# Allegro board XR872AT_REF_SAMPLE_V1_0-20191008.brd
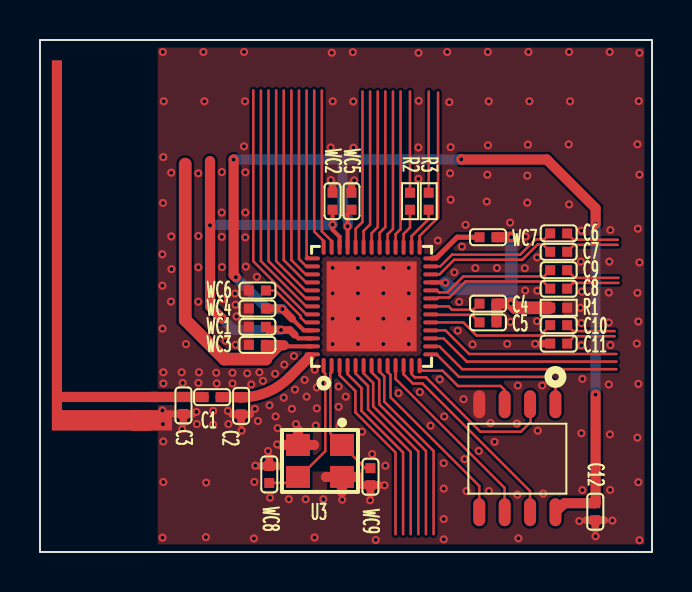
[diagram p0: board, top side]
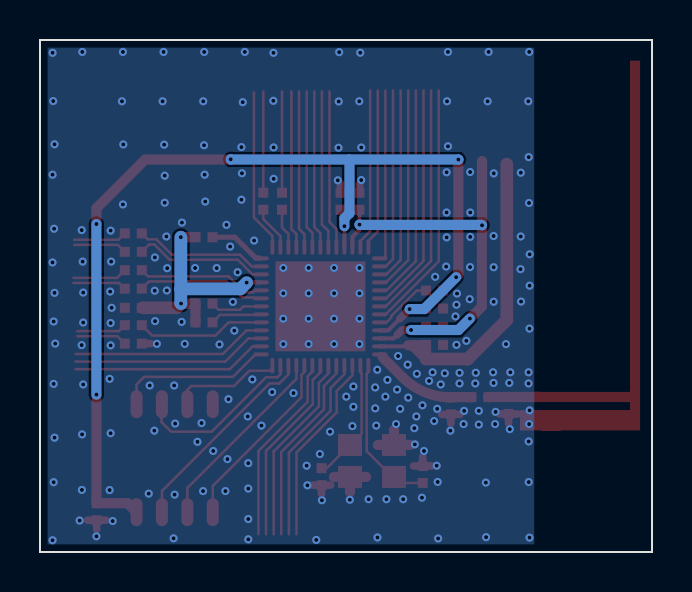
[diagram p1: board, bottom side, seen from below]

Outline 30.61 x 25.62 mm; copper layers: TOP, BOTTOM. Coordinates in mm from the lower left corner of the outline.
Outline path: rectangle 0,0 30.61,25.62

## Placement (name value [footprint] x y rotation side)
C1  0R  [C0402]  8.61 7.75 180 top
C2  NC  [C0402]  10.06 7.31 90 top
C3  NC  [C0402]  7.17 7.33 90 top
C4  0.47uF  [C0402]  22.41 12.43 180 top
C5  0.47uF  [C0402]  22.41 11.49 180 top
C6  104  [C0402]  25.94 15.94 180 top
C7  104  [C0402]  25.94 15.02 180 top
C8  104  [C0402]  25.94 13.17 180 top
C9  104  [C0402]  25.94 14.1 180 top
C10  104  [C0402]  25.94 11.35 180 top
C11  104  [C0402]  25.94 10.43 180 top
C12  NC-104  [C0402]  27.77 2.02 90 top
JW1  ANT-F  [ANT2B18_54X5_30]  5.64 7.76 90 top
R1  0R  [R0402]  25.94 12.22 0 top
R2  510R  [R0402]  18.51 17.55 90 top
R3  510R  [R0402]  19.44 17.55 90 top
U2  XR872AT  [QFN52P0_4B6_00X6_00]  16.58 12.29 90 top
U3  40MHz-E3SB40MHz  [CRY-TSX3225]  14 4.56 270 top
U4  SPI_NOR_16Mb  [SOP8_150MIL]  23.87 4.67 270 top
WC1  1uF  [C0402]  10.87 11.26 0 top
WC2  NC-1uF  [C0402]  14.63 17.55 270 top
WC3  1uF  [C0402]  10.87 10.36 180 top
WC4  1uF  [C0402]  10.87 12.18 180 top
WC5  NC-1uF  [C0402]  15.58 17.55 270 top
WC6  1uF  [C0402]  10.87 13.08 0 top
WC7  1uF  [C0402]  22.41 15.75 180 top
WC8  10pF  [C0402]  11.47 3.88 270 top
WC9  10pF  [C0402]  16.53 3.77 270 top

## Library data of the parts
C1-C11 WC2-WC7 WC9 = CAPACITOR
C12 WC1 WC8 = CAPACITOR_0
JW1 = ANT-F_1
R1-R3 = R
U2 = XR872AT_0
U3 = Crystal4Pin_0
U4 = SPI-NOR-SO8

## Footprints (pads in the part's own frame, mm; a bottom-side part is the same pattern mirrored in y, then rotated)
ANT2B18_54X5_30
  rect 1.016x1.016 smd: 1(-1.168,0.577)
  rect 0.508x0.508 smd: 2(0,0)
C0402
  rect 0.5x0.5 smd: 1(-0.425,0) 2(0.425,0)
CRY-TSX3225
  rect 1.1x1.2 smd: 1(-0.8,1.1) 2(-0.8,-1.1) 3(0.8,-1.1) 4(0.8,1.1)
QFN52P0_4B6_00X6_00
  oval 0.77x0.2 smd: 1(-2.965,2.4) 2(-2.965,2) 3(-2.965,1.6) 4(-2.965,1.2) 5(-2.965,0.8) 6(-2.965,0.4) 7(-2.965,0) 8(-2.965,-0.4) 9(-2.965,-0.8) 10(-2.965,-1.2) 11(-2.965,-1.6) 12(-2.965,-2) 13(-2.965,-2.4) 27(2.965,-2.4) 28(2.965,-2) 29(2.965,-1.6) 30(2.965,-1.2) 31(2.965,-0.8) 32(2.965,-0.4) 33(2.965,0) 34(2.965,0.4) 35(2.965,0.8) 36(2.965,1.2) 37(2.965,1.6) 38(2.965,2) 39(2.965,2.4)
  oval 0.2x0.77 smd: 14(-2.4,-2.965) 15(-2,-2.965) 16(-1.6,-2.965) 17(-1.2,-2.965) 18(-0.8,-2.965) 19(-0.4,-2.965) 20(0,-2.965) 21(0.4,-2.965) 22(0.8,-2.965) 23(1.2,-2.965) 24(1.6,-2.965) 25(2,-2.965) 26(2.4,-2.965) 40(2.4,2.965) 41(2,2.965) 42(1.6,2.965) 43(1.2,2.965) 44(0.8,2.965) 45(0.4,2.965) 46(0,2.965) 47(-0.4,2.965) 48(-0.8,2.965) 49(-1.2,2.965) 50(-1.6,2.965) 51(-2,2.965) 52(-2.4,2.965)
  rect 4.5x4.5 smd: 53(0,0)
R0402
  rect 0.5x0.5 smd: 1(-0.425,0) 2(0.425,0)
SOP8_150MIL
  oval 1.4x0.6 smd: 1(-2.725,1.905) 2(-2.725,0.635) 3(-2.725,-0.635) 4(-2.725,-1.905) 5(2.675,-1.905) 6(2.675,-0.635) 7(2.675,0.635) 8(2.675,1.905)

## Nets
AVDD: U2.26(AVDD) WC7.2
GND: C2.1 C3.1 C11.2 C12.1 JW1.1(A) R1.2 U2.53(EPAD) U3.2 U3.4(5) U4.4(VSS) WC1.1 WC2.1 WC3.2 WC4.2 WC5.1 WC6.1 WC8.1 WC9.2
VCC-BAT: U2.51(VBAT) WC3.1
VDD-ANA: U2.37(VDD_PSM) U2.50(VDD_ANA) WC1.2 WC2.2
VDD-EXT: C12.2 U2.36(VDDIO) U2.49(VDD_EXT) U4.8(VCC) WC4.1 WC5.2
ANT: C1.2 C3.2 JW1.2(G)
CHIP-PWD: U2.47(CHIP_PWD)
HXTAL1: U2.2(HXTAL1) U3.1 WC9.1
HXTAL2: U2.1(HXTAL2) U3.3 WC8.2
LINEINN: C9.2 U2.22(LINEN)
LINEINP: C8.2 U2.21(LINEP)
LOUTP: C10.2 U2.18(LOUTP)
MICN: C7.2 U2.24(MICN)
MICP: C6.2 U2.25(MICP)
PA0: U2.5(PA0/SPI1_MOSI/SD_CMD/TWI1_SCL/C)
PA1: U2.6(PA1/SPI1_MISO/SD_DATA0/TWI1_SDA)
PA2: U2.7(PA2/SPI1_CLK/SD_CLK/UART0_TX/CS)
PA3: U2.8(PA3/SPI1_CS0/SD_DATA1/UART0_RX/)
PA4: U2.35(PA4/WUPIO0/UART1_RTS/SD_DATA2/T)
PA5: U2.34(PA5/WUPIO1/UART1_CTS/SD_DATA3/T)
PA6: U2.33(PA6/WUPIO2/UART1_RX/SPI1_CS1/TW)
PA7: U2.32(PA7/WUPIO3/UART1_TX/SPI1_CS2/TW)
PA8: U2.41(PA8/FEM_CTRL1/PWM0/TWI1_SCL/CSI)
PA9: U2.40(PA9/FEM_CTRL2/PWM1/TWI1_SDA/CSI)
PA10: U2.39(PA10/ADC_CH0/PWM2/DMIC_CLK/CSI_)
PA11: U2.38(PA11/ADC_CH1/PWM3/DMIC_DATA/CSI)
PA12: U2.46(PA12/ADC_CH2/PWM4/I2S_MCLK/IR_T)
PA13: U2.45(PA13/ADC_CH3/PWM5/I2S_BCLK/UART)
PA14: U2.44(PA14/ADC_CH4/PWM6/I2S_DI/UART1_)
PA15: U2.43(PA15/ADC_CH5/PWM7/I2S_DO/UART1_)
PA16: U2.42(PA16/ADC_CH6/IR_RX/I2S_LRCLK/UA)
PA19: U2.31(PA19/WUPIO5/UART2_RTS/TWI0_SCL/)
PA20: U2.30(PA20/WUPIO6/UART2_CTS/TWI0_SDA/)
PA21: R2.1 U2.29(PA21/WUPIO7/UART2_RX/DMIC_CLK/P)
PA22: R3.1 U2.28(PA22/WUPIO8/UART2_TX/DMIC_DATA/)
PA23: U2.27(PA23/WUPIO9/TEST/EXT_DCDC_PUP/F)
PB2: U2.13(PB2/SWD_TMS/JTAG_TDO/PWM6/FLASH) U4.3(WP#)
PB3: U2.11(PB3/SWD_TCK/JTAG_TDI/PWM7/FLASH) U4.7(HOLD#)
PB16: U2.15(PB16/SD_CMD/EINTB16)
PB17: U2.16(PB17/SD_DATA0/EINTB17)
PB18: U2.17(PB18/SD_CLK/EINTB18)
RF: C1.1 C2.2 U2.52(ANT)
SPI0-CLK: U2.10(PB7/SPI0_CLK/SD_CLK/UART1_RTS/F) U4.6(CLK)
SPI0-CS: U2.14(PB6/SPI0_CS0/FEM_CTRL2/UART1_CT) U4.1(CS#)
SPI0-MISO: U2.12(PB5/SPI0_MISO/SD_DATA0/UART1_RX) U4.2(MISO)
SPI0-MOSI: U2.9(PB4/SPI0_MOSI/SD_CMD/UART1_TX/F) U4.5(MOSI)
UART0-RX: U2.4(PB1/UART0_RX/JTAG_TCK/PWM5/SWD_)
UART0-TX: U2.3(PB0/UART0_TX/JTAG_TMS/PWM4/SWD_)
N17215602: C11.1
N17215603: C10.1
N17220262: C4.1 C5.1 R1.1 U2.23(AGND) WC7.1
N17220370: C4.2 U2.20(VRA1)
N17220484: U2.48(VDD_DIG) WC6.2
N17220546: C5.2 U2.19(VRA2)
N17222306: R2.2
N17222380: R3.2
N17223703: C9.1
N17223705: C8.1
N17227750: C6.1
N17227752: C7.1

## Via types
v1: diameter 0.406, hole 0.203, TOP to BOTTOM, 241 vias

## Routing (per net, layer and track width the routed paths; a pad name or vN(x,y) marks a point on that pad's centre or on a via; arc(x,y) is an arc through that point)
AVDD: length 2.9
  TOP w0.203: U2.26 19.63,14.69 19.66,14.72
  TOP w0.254: WC7.2 20.86,15.75 19.83,14.72 19.66,14.72
GND: length 12.9
  TOP w0.381: 27.77,1.14 C12.1 ; C12.1 27.32,1.59 ; C12.1 28.23,1.59 ; WC9.2 16.98,3.35 ; WC9.2 16.07,3.35 ; WC9.2 16.53,2.89 ; WC8.1 11.47,4.76 ; WC8.1 11.92,4.3 ; WC8.1 11.01,4.3 ; C3.1 7.63,6.91 ; C3.1 7.17,6.45 ; C3.1 6.72,6.91 ; WC2.1 14.63,18.43 ; WC5.1 15.58,18.43 ; 9.61,6.89 C2.1 ; C2.1 10.06,6.43 ; C2.1 10.51,6.89 ; 25.06,10.43 C11.2
  TOP w0.508: U3.4 15.91,3.76 ; U3.4 15.1,3 ; U3.4 14.3,3.76 ; 12.1,5.36 U3.2 ; U3.2 12.9,6.11 ; U3.2 13.71,5.36
  vias: v1(6.14,25.02) v1(6.12,14.89) v1(6.12,13.32) v1(6.13,11.18) v1(6.12,7.09) v1(6.15,6.4) v1(6.13,0.72) v1(6.19,22.55) v1(6.17,19.76) v1(6.15,17.46) v1(6.17,8.99) v1(6.17,8.43) v1(6.17,5.53) v1(6.17,3.5) v1(6.55,12.53) v1(6.56,18.98) v1(6.57,15.79) v1(6.58,14.15) v1(7.09,8.99) v1(7.14,8.46) v1(7.11,6.15) v1(7.3,10.4) v1(7.82,7.01) v1(7.85,6.4) v1(7.91,18.94) v1(7.92,15.81) v1(7.92,14.25) v1(7.92,12.52) v1(7.92,8.46) v1(7.95,8.99) v1(8.17,25.02) v1(8.22,22.55) v1(8.31,3.47) v1(8.3,0.74) v1(8.66,7.06) v1(8.66,6.38) v1(8.81,8.97) v1(8.84,8.43) v1(9.1,19.01) v1(9.09,16.98) v1(9.09,15.77) v1(9.1,14.25) v1(9.12,12.65) v1(9.29,10.57) v1(9.4,7.06) v1(9.42,6.4) v1(9.63,8.97) v1(9.63,8.43) v1(9.75,12.93) v1(9.78,12.37) v1(9.83,11.79) v1(9.78,10.36) v1(10.08,6.07) v1(10.21,25.02) v1(10.2,20.3) v1(10.25,22.55) v1(10.27,19) v1(10.27,16.98) v1(10.27,15.74) v1(10.3,14.28) v1(10.36,8.94) v1(10.57,8.38) v1(10.74,7.16) v1(10.72,3.51) v1(10.7,0.68) v1(10.85,13.77) v1(10.77,4.32) v1(10.9,6.55) v1(10.97,8.99) v1(11.15,8.56) v1(11.4,5.05) v1(11.48,7.34) v1(11.51,2.72) v1(11.76,8.92) v1(11.79,6.78) v1(11.89,6.2) v1(11.86,5.38) v1(12.22,9.37) v1(12.19,7.72) v1(12.45,2.64) v1(12.6,7.16) v1(12.7,9.8) v1(12.75,8.13) v1(12.8,6.4) v1(13.23,8.61) v1(13.34,7.77) v1(13.28,2.64) v1(13.74,9.12) v1(13.73,0.73) v1(13.85,8.23) v1(13.84,7.19) v1(13.79,6.32) v1(14.17,2.64) v1(14.54,20.24) v1(14.54,18.61) v1(14.59,24.98) v1(14.64,22.55) v1(14.63,14.21) v1(14.63,12.94) v1(14.63,11.67) v1(14.63,10.4) v1(14.94,8.28) v1(14.94,7.26) v1(14.99,6.3) v1(15.11,2.62) v1(15.29,7.77) v1(15.65,25.01) v1(15.67,22.54) v1(15.68,20.22) v1(15.71,18.59) v1(15.9,14.21) v1(15.9,12.94) v1(15.9,11.67) v1(15.9,10.4) v1(16.1,6.02) v1(16.51,2.59) v1(16.61,4.9) v1(16.79,0.61) v1(17.17,14.21) v1(17.17,12.94) v1(17.17,11.67) v1(17.17,10.4) v1(17.23,3.34) v1(17.27,4.32) v1(17.93,7.95) v1(18.44,14.21) v1(18.44,12.94) v1(18.44,11.67) v1(18.44,10.4) v1(18.93,24.97) v1(18.94,22.57) v1(18.93,20.24) v1(18.92,18.67) v1(19,8) v1(19.53,6.32) v1(19.9,15.58) v1(19.99,8.64) v1(20.22,6.78) v1(20.19,4.45) v1(20.19,3.17) v1(20.19,1.65) v1(20.19,0.64) v1(20.37,25.02) v1(20.47,22.5) v1(20.54,20.26) v1(20.51,18.95) v1(20.54,17.62) v1(20.73,14) v1(20.89,11.07) v1(20.96,12.51) v1(21.1,15.28) v1(21.18,7.65) v1(21.23,4.65) v1(21.28,16.37) v1(21.34,3.05) v1(21.63,10.39) v1(21.77,14.2) v1(21.95,5.05) v1(22.35,17.53) v1(22.4,25.02) v1(22.44,22.55) v1(22.4,20.35) v1(22.37,18.88) v1(22.53,6.45) v1(22.45,3.05) v1(22.73,5.51) v1(22.85,14.21) v1(23.37,10.41) v1(23.51,16.48) v1(23.53,11.51) v1(23.9,8.33) v1(23.85,6.43) v1(23.88,2.87) v1(23.93,0.69) v1(24.25,14.2) v1(24.29,15.78) v1(24.27,13.08) v1(24.43,25.02) v1(24.4,20.38) v1(24.37,18.83) v1(24.37,17.47) v1(24.48,22.55) v1(24.77,10.41) v1(24.86,14.74) v1(24.87,13.07) v1(24.85,11.55) v1(24.89,6.07) v1(25.12,8.33) v1(25.17,2.92) v1(26.44,20.39) v1(26.46,25.02) v1(26.51,22.55) v1(26.46,17.39) v1(27.03,12.22) v1(26.97,1.55) v1(27.08,16.08) v1(27.05,14.53) v1(27.1,13.03) v1(27.08,11.46) v1(27.08,10.34) v1(27.13,8.66) v1(27.08,5.94) v1(27.13,3.1) v1(27.79,0.79) v1(28.45,12.98) v1(28.45,11.48) v1(28.45,8.38) v1(28.49,25.02) v1(28.52,16.1) v1(28.47,14.53) v1(28.53,10.35) v1(28.5,5.89) v1(28.51,3.11) v1(28.63,1.57) v1(29.85,10.43) v1(29.95,22.56) v1(29.88,20.4) v1(29.9,16.17) v1(29.88,12.96) v1(29.93,11.53) v1(29.93,8.41) v1(29.88,5.72) v1(29.93,3.49) v1(29.98,24.97) v1(29.98,18.88) v1(29.98,14.49) v1(29.98,0.59)
VCC-BAT: length 16.6
  TOP w0.203: 12.19,10.34 12.25,10.29 U2.51
  TOP w0.508: 11.91,10.34 11.91,10.26 11.3,9.65 WC3.1 11.32,10.34 11.91,10.34 ; 11.91,10.34 12.19,10.34
  TOP w0.635: 11.3,9.65 9.22,9.65 7.26,11.61 7.26,19.41
VDD-ANA: length 22
  TOP w0.203: U2.37 14.98,15.77 14.63,16.12 v1(14.63,16.38) WC2.2 ; U2.50 12.92,10.69 12.74,10.87
  TOP w0.381: 12.74,10.87 12.51,11.1 12.06,11.1 ; 12.06,11.1 v1(12.05,11.11) ; 12.06,11.1 11.46,11.1 WC1.2
  TOP w0.508: v1(9.11,11.68) 8.51,12.28 8.51,16.34 v1(8.5,16.34) 8.5,19.56
  BOTTOM w0.508: v1(14.63,16.38) 14.62,16.36 8.52,16.36 v1(8.5,16.34) ; v1(12.05,11.11) 9.68,11.11 v1(9.11,11.68)
VDD-EXT: length 53.2
  TOP w0.203: 12.61,11.67 13.19,11.09 U2.49 ; U2.36 v1(15.39,16.3) 15.39,16.93 WC5.2
  TOP w0.381: 12.61,11.67 v1(12.13,12.15) 12.1,12.18 WC4.1
  TOP w0.508: v1(27.79,7.87) 27.79,2.46 C12.2 26.23,2.44 U4.8 ; v1(9.8,13.75) 9.69,13.86 9.69,19.63 v1(9.68,19.63) ; v1(21.07,19.65) 21.09,19.63 25.35,19.63 27.79,17.2 v1(27.79,16.41)
  BOTTOM w0.508: v1(9.8,13.75) 11.39,12.15 v1(12.13,12.15) ; v1(27.79,7.87) v1(27.79,16.41) ; v1(21.07,19.65) 21.06,19.63 15.14,19.63 ; 15.14,19.63 15.13,19.63 15.13,16.95 15.39,16.69 v1(15.39,16.3) ; 15.14,19.63 9.69,19.63 v1(9.68,19.63)
ANT: length 2.6
  TOP w0.508: JW1.2 5.64,7.76 C3.2 8.17,7.76 C1.2
CHIP-PWD: length 12.6
  TOP w0.127: 10.67,23.09 10.67,14.54 13.32,11.89 U2.47
HXTAL1: length 6.1
  TOP w0.127: U2.2 14.58,9 14.52,8.94 14.52,5.94 U3.1 16.26,4.2 WC9.1
HXTAL2: length 7.8
  TOP w0.127: WC8.2 12.6,3.45 U3.3 12.98,3.76 14.27,5.05 14.27,8.91 14.18,9 U2.1
LINEINN: length 6.5
  TOP w0.127: U2.22 19.86,13.09 19.96,12.99 20.37,12.99 21.17,13.79 25.21,13.79 C9.2
LINEINP: length 6.5
  TOP w0.127: C8.2 25.16,13.53 21.28,13.53 20.48,12.73 19.93,12.73 19.89,12.69 U2.21
LOUTP: length 6.5
  TOP w0.127: C10.2 25,10.83 21.83,10.83 21.17,11.49 U2.18
MICN: length 6.7
  TOP w0.127: U2.24 19.98,13.89 20.71,14.62 24.12,14.62 24.89,15.39 25.15,15.39 C7.2
MICP: length 6.7
  TOP w0.127: C6.2 25.22,15.64 24.79,15.64 24.02,14.88 20.61,14.88 20.02,14.29 U2.25
PA0: length 9.6
  TOP w0.127: U2.5 15.78,8.93 16.41,8.31 16.41,7.14 18.54,5 18.54,0.89
PA1: length 9.6
  TOP w0.127: 18.92,0.89 18.92,5.03 16.66,7.29 16.66,8.46 16.18,8.94 U2.6
PA2: length 9.6
  TOP w0.127: 19.3,0.89 19.3,5.05 16.97,7.39 16.97,8.61 16.58,8.99 U2.7
PA3: length 9.6
  TOP w0.127: 19.68,0.89 19.68,5.05 17.22,7.52 17.22,8.79 16.98,9.02 U2.8
PA4: length 7.9
  TOP w0.127: U2.35 15.78,16.17 16.13,16.51 16.13,23.04
PA5: length 7.9
  TOP w0.127: 16.51,23.04 16.51,16.38 16.18,16.06 U2.34
PA6: length 7.9
  TOP w0.127: U2.33 16.58,15.95 16.89,16.26 16.89,23.04
PA7: length 7.9
  TOP w0.127: U2.32 16.98,15.97 17.27,16.26 17.27,23.04
PA8: length 9.3
  TOP w0.127: U2.41 13.32,14.29 12.95,14.66 12.95,23.09
PA9: length 8.6
  TOP w0.127: 13.34,23.09 13.34,14.81 13.46,14.69 U2.40
PA10: length 8
  TOP w0.127: 13.72,23.09 13.72,16.03 14.18,15.56 U2.39
PA11: length 8
  TOP w0.127: 14.1,23.09 14.1,16.05 14.58,15.56 U2.38
PA12: length 12
  TOP w0.127: U2.46 13.32,12.29 11.05,14.55 11.05,23.09
PA13: length 11.5
  TOP w0.127: U2.45 13.3,12.69 11.43,14.55 11.43,23.09
PA14: length 11
  TOP w0.127: 11.81,23.09 11.81,14.55 13.28,13.09 U2.44
PA15: length 10.4
  TOP w0.127: U2.43 13.31,13.49 12.19,14.61 12.19,23.09
PA16: length 9.8
  TOP w0.127: 12.57,23.09 12.57,14.61 13.29,13.89 U2.42
PA19: length 7.9
  TOP w0.127: U2.31 17.39,15.9 17.65,16.16 17.65,23.04
PA20: length 7.9
  TOP w0.127: U2.30 17.78,15.9 18.03,16.15 18.03,23.04
PA21: length 2
  TOP w0.127: U2.29 18.18,15.91 18.51,16.23 R2.1
PA22: length 2.2
  TOP w0.127: R3.1 19.44,16.66 18.58,15.8 U2.28
PA23: length 8.1
  TOP w0.127: 19.91,22.99 19.91,16.73 18.98,15.81 U2.27
PB2: length 5.5
  TOP w0.127: U4.3 23.24,8.1 23.04,8.31 20.9,8.31 20.14,9.07 19.11,9.07 18.98,9.19 U2.13
PB3: length 10.2
  TOP w0.127: U4.7 24.51,3.05 19.13,8.43 18.64,8.43 18.18,8.89 U2.11
PB16: length 9.8
  TOP w0.127: 28.83,9.14 21.12,9.14 19.97,10.29 U2.15
PB17: length 9.8
  TOP w0.127: 28.83,9.53 21.34,9.53 20.18,10.69 U2.16
PB18: length 9.8
  TOP w0.127: 28.83,9.91 21.46,9.91 20.28,11.09 U2.17
RF: length 5.3
  TOP w0.203: 13.48,9.75 U2.52
  TOP w0.508: C1.1 10.05,7.75 C2.2 arc(11.36,8) 12.47,8.73 13.48,9.75
SPI0-CLK: length 9.6
  TOP w0.127: U2.10 17.78,8.66 23.24,3.2 U4.6
SPI0-CS: length 7.8
  TOP w0.127: U4.1 25.78,8.38 25.4,8.76 20.95,8.76 19.83,9.89 U2.14
SPI0-MISO: length 8.7
  TOP w0.127: U2.12 18.58,8.9 18.75,8.74 19.3,8.74 22.02,6.02 24.05,6.02 24.54,6.5 24.54,7.37 U4.2
SPI0-MOSI: length 9.2
  TOP w0.127: U2.9 17.39,9.01 17.53,8.86 17.53,7.74 21.97,3.3 U4.5
UART0-RX: length 9.6
  TOP w0.127: U2.4 15.39,8.9 16.08,8.2 16.08,7.06 18.16,4.98 18.16,0.89
UART0-TX: length 9.6
  TOP w0.127: 17.78,0.89 17.78,4.98 15.77,6.99 15.77,8.05 14.98,8.84 U2.3
N17215602: length 2.5
  TOP w0.127: C11.1 26.74,10.79 28.74,10.79
N17215603: length 2.5
  TOP w0.127: C10.1 26.67,11.05 28.74,11.05
N17220262: length 11.9
  TOP w0.203: v1(20.27,13.48) 20.26,13.49 U2.23
  TOP w0.254: R1.1 25.46,12.22
  TOP w0.508: v1(23.57,15.75) 23.56,15.75 WC7.1 ; C5.1 C4.1 23.55,12.43 v1(23.56,12.43)
  TOP w0.635: 25.46,12.22 23.77,12.22 v1(23.56,12.43)
  BOTTOM w0.635: 23.56,13.17 20.58,13.17 v1(20.27,13.48) ; 23.56,13.17 23.57,13.17 v1(23.57,15.75) ; 23.56,13.17 23.57,13.16 23.57,12.44 v1(23.56,12.43)
N17220370: length 2.6
  TOP w0.127: U2.20 20.44,12.29 20.61,12.12 21.68,12.12 C4.2
N17220484: length 3
  TOP w0.127: WC6.2 11.77,13.08 13.04,11.8 13.04,11.72 13.28,11.49 U2.48
N17220546: length 2.6
  TOP w0.127: C5.2 21.6,11.87 19.57,11.87 U2.19
N17222306: length 5.1
  TOP w0.127: R2.2 18.51,23.04
N17222380: length 5.1
  TOP w0.127: R3.2 19.44,23.04
N17223703: length 2.7
  TOP w0.127: C9.1 26.75,13.72 28.93,13.72
N17223705: length 2.7
  TOP w0.127: 28.93,13.46 26.65,13.46 C8.1
N17227750: length 2.7
  TOP w0.127: C6.1 26.69,15.62 28.9,15.62
N17227752: length 2.7
  TOP w0.127: C7.1 26.72,15.37 28.9,15.37

## Copper pours and planes (outline as drawn; the poured copper is in the pictures)
GND on TOP (solid shape): 6.6,6.08 4.57,6.08 4.57,7.1 6.6,7.1
GND on TOP, BOTTOM: 0.38,0.38 0.38,25.23 30.23,25.23 30.23,0.38
Net_62 on TOP (solid shape): 1.1,8.01 5.89,8.01 5.89,7.5 1.1,7.5 1.1,7.1 5.57,7.1 5.57,6.08 0.59,6.08 0.59,24.6 1.1,24.6

## Text on the board
DISPLAY_TOP: FIGURE | SIZE | 7.99 | 19.69 | DRILL CHART: TOP to BOTTOM | ALL UNITS ARE IN MILS | PLATED | QTY | 244 | 44
